# Altium PCB LIN_Controller_Board.PcbDoc
Units mm, origin at the board's own origin, x right, y up, seen from the top; angles counter-clockwise.
Board outline 35 x 30 mm, 2 copper layers (Top Layer, Bottom Layer); 31 components, 33 nets, 137 pads, 40 vias.
Unrouted connection lines stored in the file: 3.
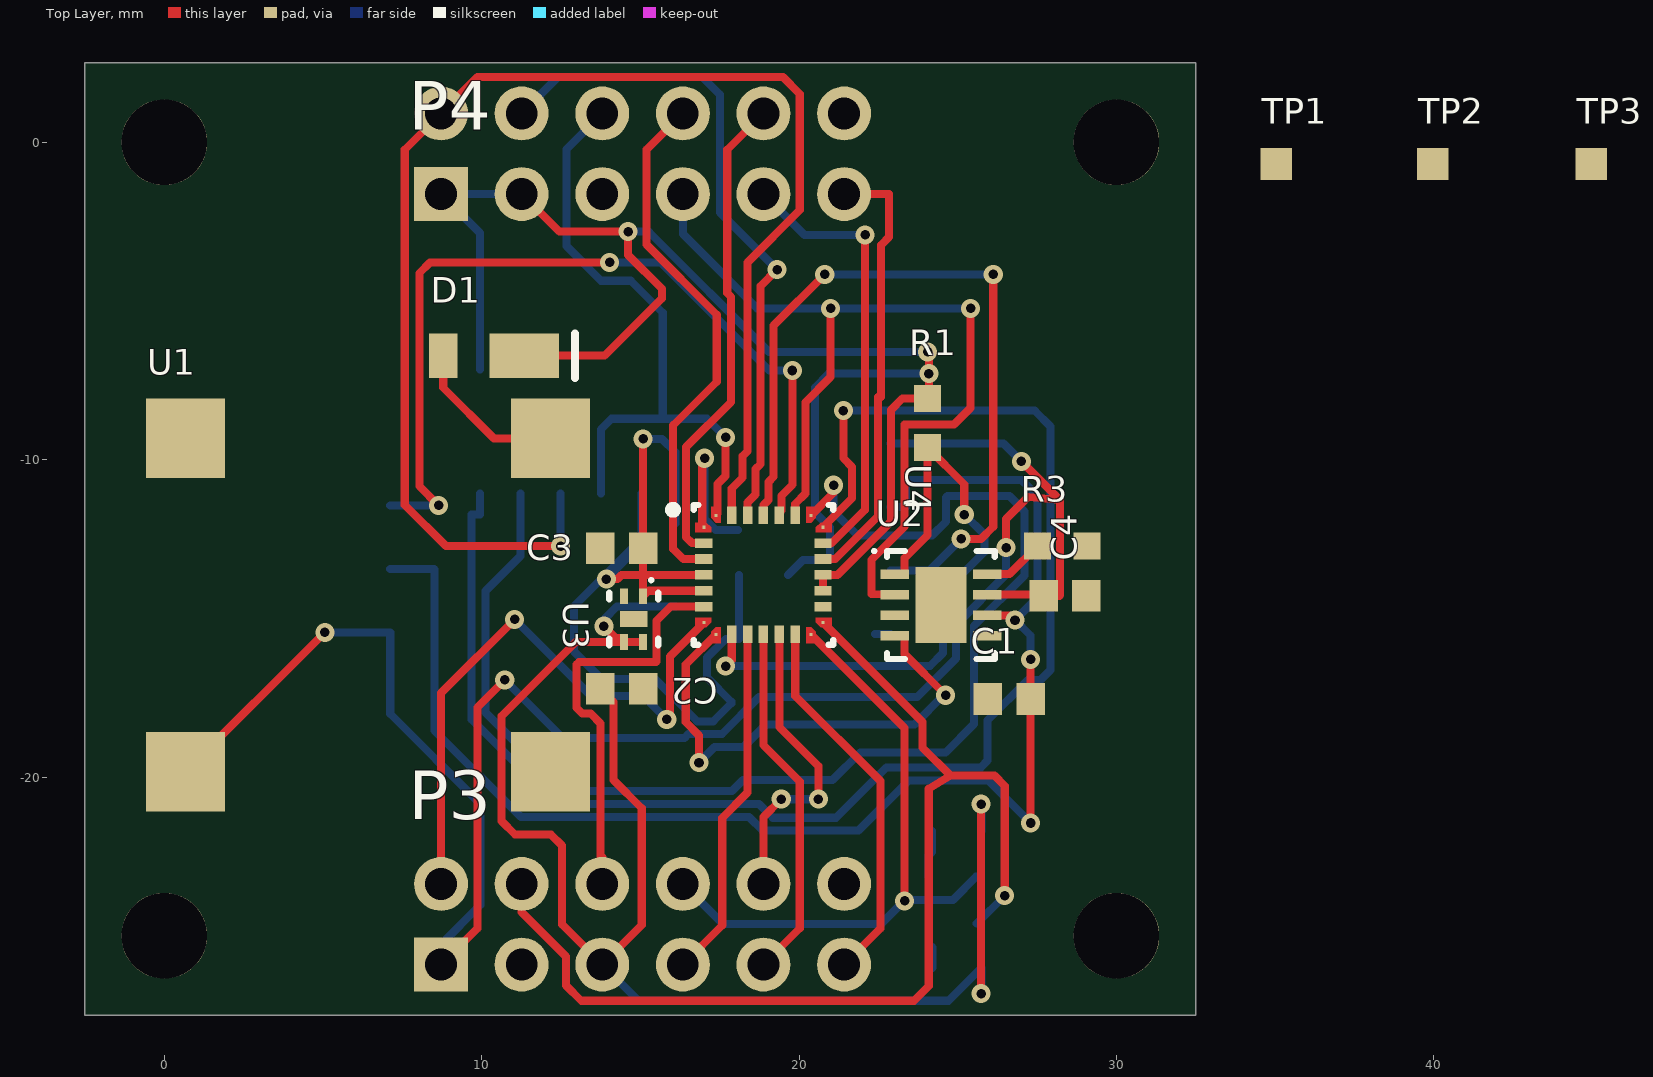
[diagram p0: Top Layer view]
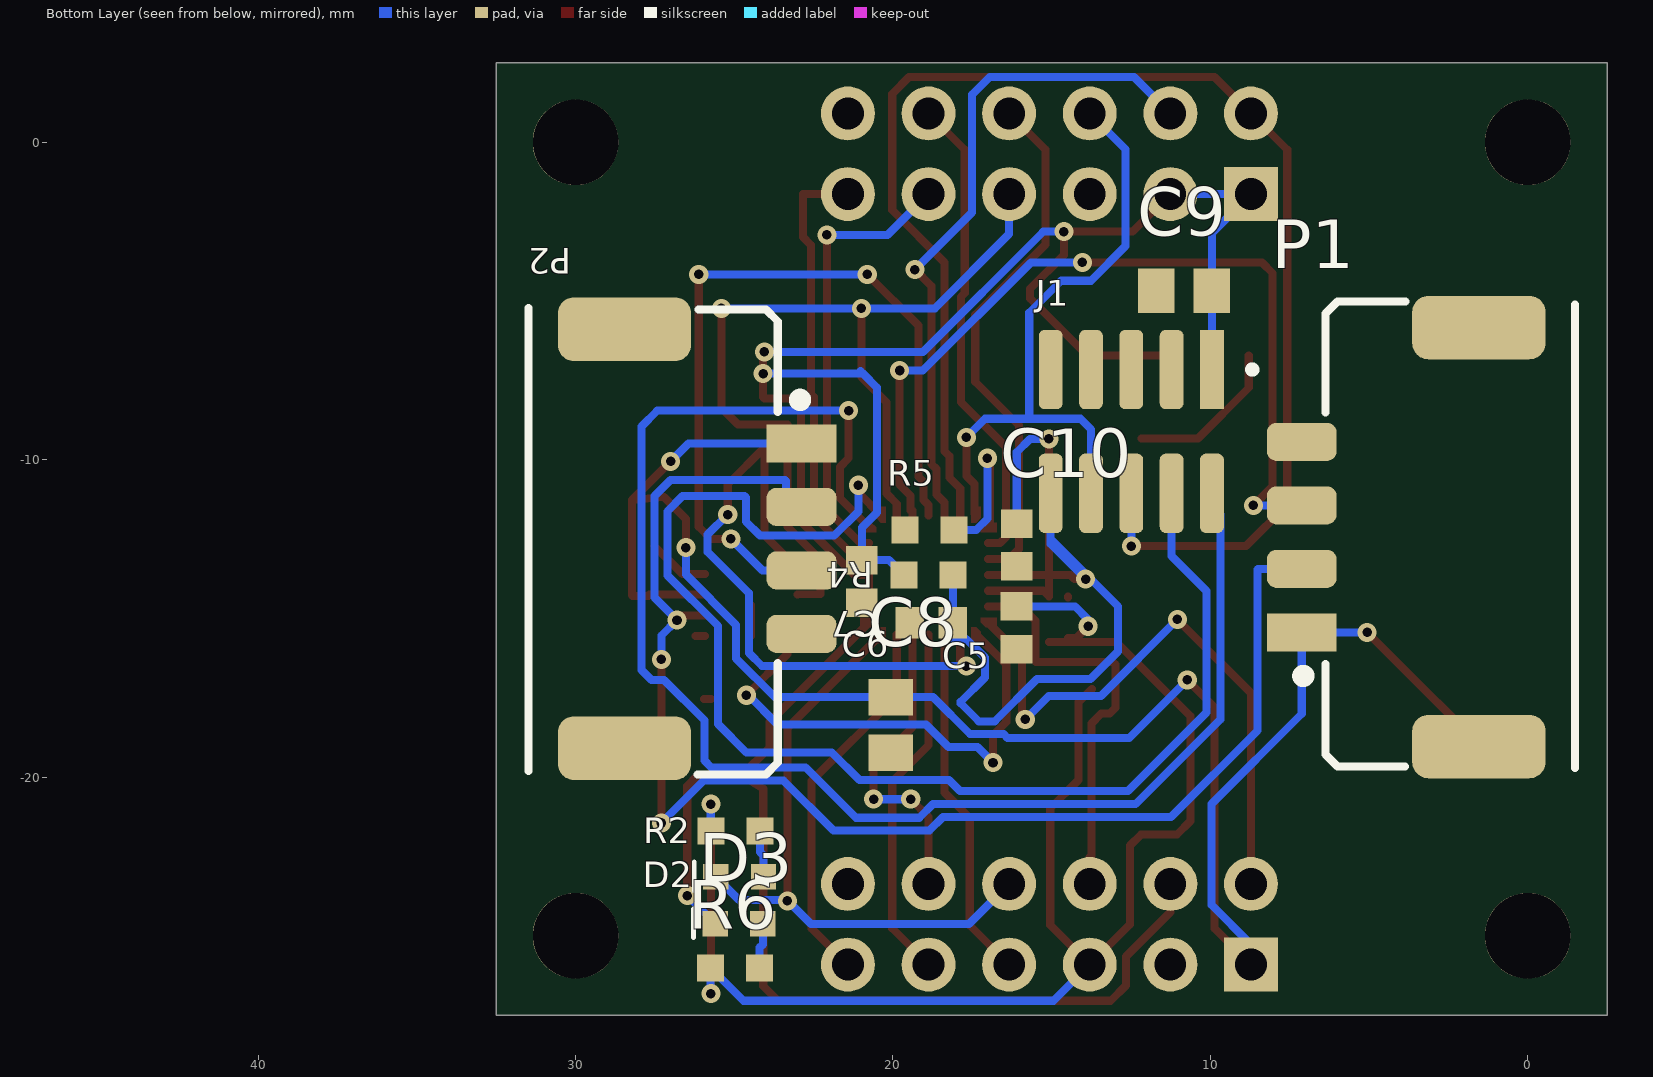
[diagram p1: Bottom Layer view, seen from below]
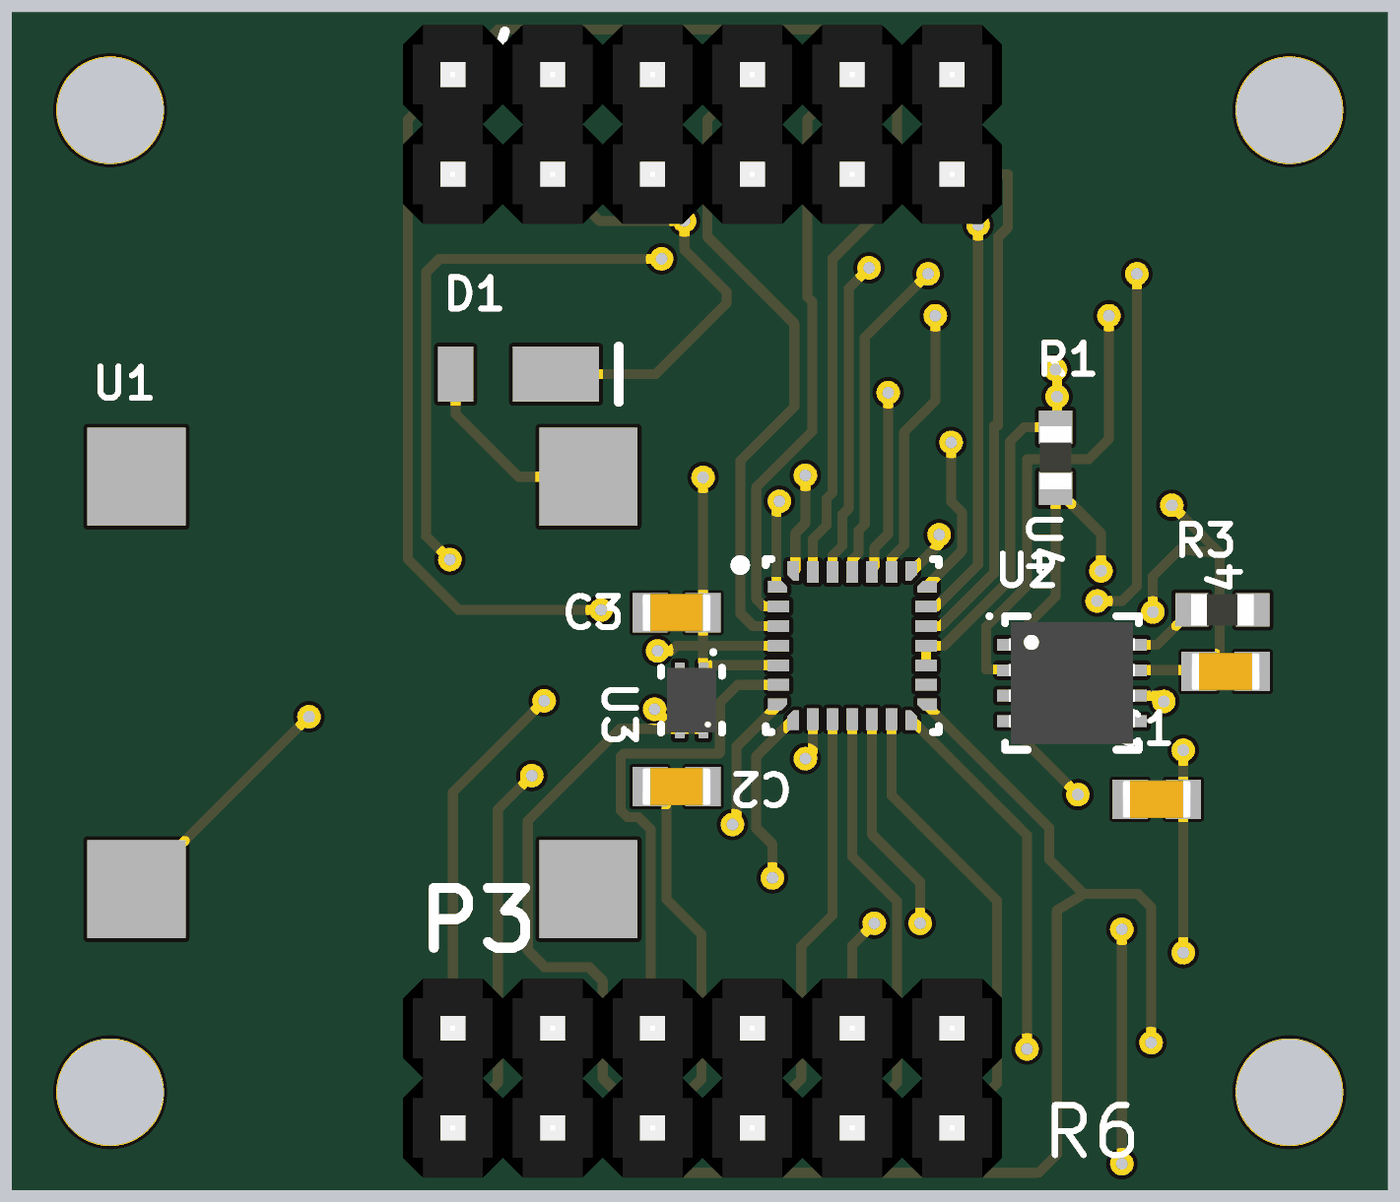
[diagram p2: 3D render of the assembled board from above, using the file's embedded part models]
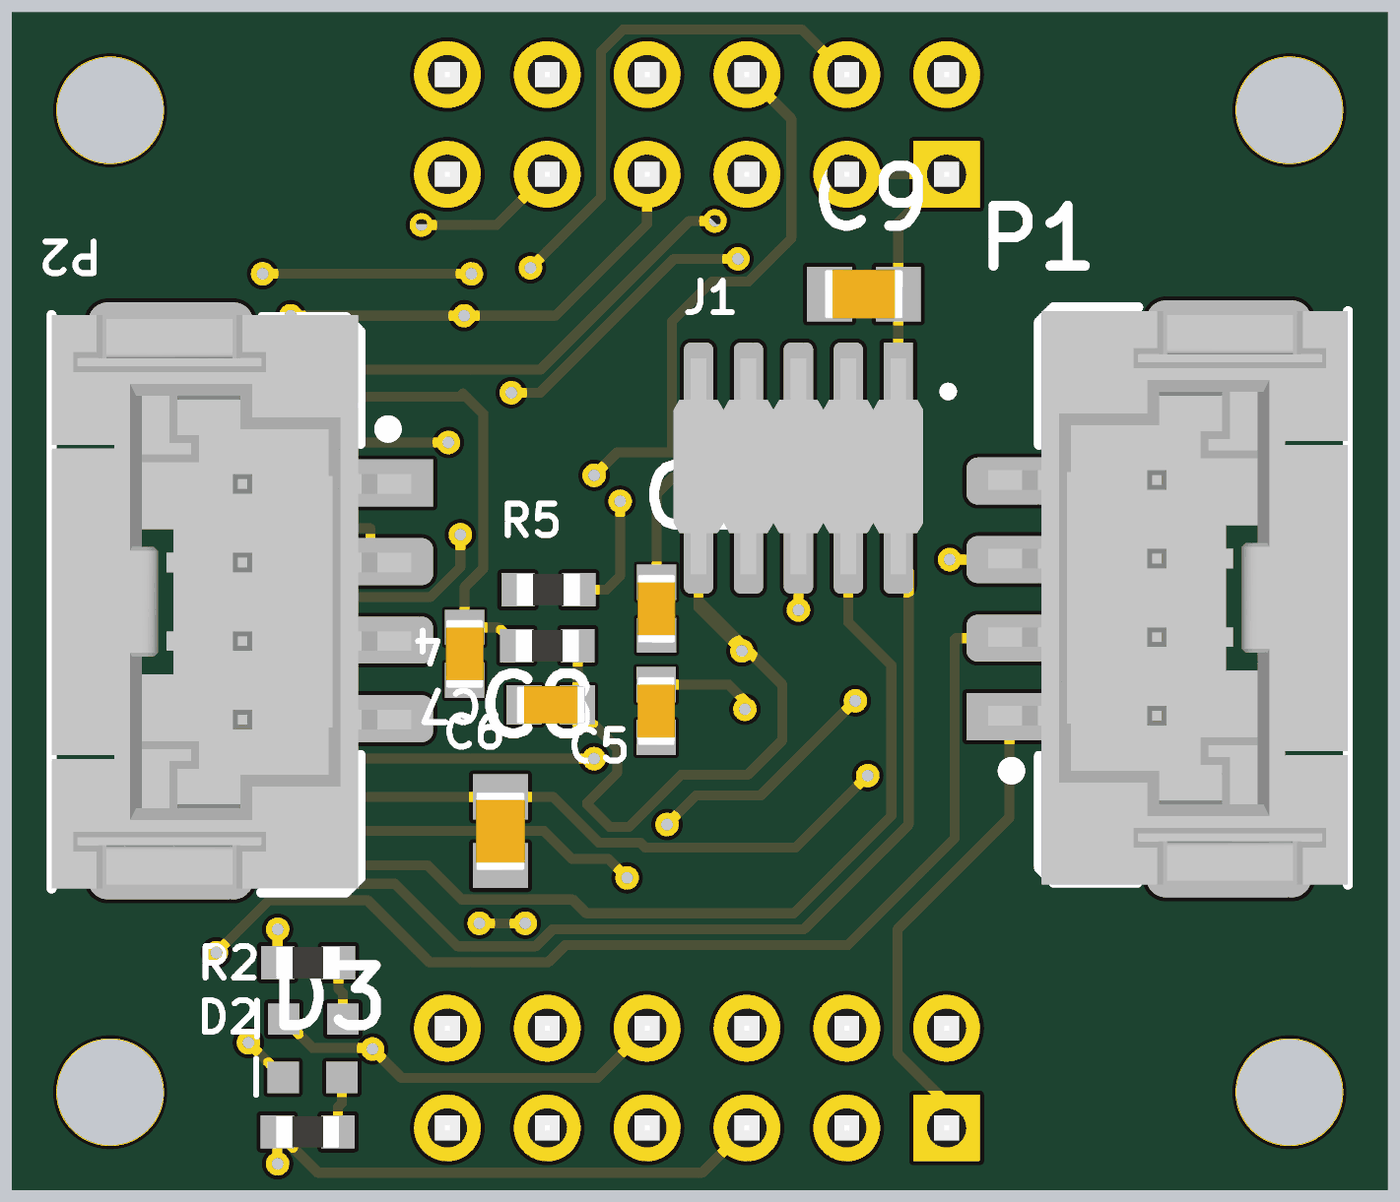
[diagram p3: 3D render of the assembled board from below, using the file's embedded part models]

## Layer stack, top to bottom
Top Solder: solder mask 0.0102, Solder Resist, Dk 3.5
Top Layer: signal copper 0.0356
Dielectric 1: dielectric 0.32, FR-4, Dk 4.8
Bottom Layer: signal copper 0.0356
Bottom Solder: solder mask 0.0102, Solder Resist, Dk 3.5

## Board outline
-2.5,-27.5 -2.5,2.5 32.5,2.5 32.5,-27.5

## Design rules (kind name [scope] priority, off if disabled: settings)
BoardOutlineClearance [All] p1: gap=0.406 ignorepadtopadclearanceinfootprint=FALSE
Clearance [All] p1: gap=0.152 ignorepadtopadclearanceinfootprint=FALSE except(0: Arc-Hole Track-Hole SMDPad-Hole THPad-Hole Via-Hole Fill-Hole Poly-Hole Region-Hole Text-Hole)
ComponentClearance ComponentClearance_ControllerBoard [InComponent('P1') vs Identifier = 'Controller-Board'] p1: gap=0 collisioncheckmode=3 verticalgap=0 showdistances=FALSE
ComponentClearance ComponentClearance_Standoffs [Identifier = 'Standoff' vs Identifier = 'Controller-Board'] p2: gap=0 collisioncheckmode=3 verticalgap=0 showdistances=FALSE
ComponentClearance [All] p3: gap=0.254 collisioncheckmode=3 verticalgap=0.254 showdistances=FALSE
DiffPairsRouting [All] p1: maxlimit=0.254 minlimit=0.254 mostfreqgap=0.254 toplayer_minwidth=0.152 toplayer_maxwidth=0.381 toplayer_prefwidth=0.254 bottomlayer_minwidth=0.152 bottomlayer_maxwidth=0.381 bottomlayer_prefwidth=0.254 maxuncoupledlength=12.7
HoleSize [All] p1: absolutevalues=TRUE maxlimit=6.3 minlimit=0.3 maxpercent=80.000 minpercent=20.000
MinimumAnnularRing [All] p1: minimumring=0.152
MinimumSolderMaskSliver [All] p1: minsoldermaskwidth=0.3
NetsToIgnore IgnoreGND [InNet('GND')] p1:
PolygonConnect [IsPad] p1: connectstyle=Relief reliefconductorwidth=0.254 reliefentries=4 polygonreliefangle="90 Angle" airgapwidth=0.254
PolygonConnect PolygonConnect_NoThermal [Not(IsPad)] p2: connectstyle=Direct reliefconductorwidth=0.254 reliefentries=4 polygonreliefangle="90 Angle" airgapwidth=0.254
RoutingVias [All] p1: holewidth=0.3 width=0.6 viastyle="Through Hole" minholewidth=0.3 minwidth=0.6 maxholewidth=0.711 maxwidth=1.27
SilkToSolderMaskClearance [IsPad] p1: minsilkscreentomaskgap=0.178 clearancetoexposedcopper=TRUE
SolderMaskExpansion [All] p1: expansion=0.102
Width [All] p1: maxlimit=2.54 minlimit=0.152 preferedwidth=0.254
25 further rules are at their usual default settings.

## Classes and differential pairs
component class LIN_Controller_Board: C1 C2 C3 C4 C5 C6 C7 C8 C9 C10 D1 D2 D3 J1 P1 P2 P3 P4 R1 R2 R3 R4 R5 R6 TP1 TP2 TP3 U2 U3
differential pair CAN_1: +CAN_1_P -CAN_1_N

## Components (designator, comment, footprint, x,y, rotation, side; value= is the part's Value field where it differs from the comment)
C1 "CAP CER 220PF 50V 5% X7R 0603" "CAP, 0603" 26.625,-17.54 r180 top value=220pF
C2 "CAP CER 1UF 50V 10% X7R 0603" "CAP, 0603" 14.41,-17.22 r0 top
C3 "CAP CER 1UF 50V 10% X7R 0603" "CAP, 0603" 14.41,-12.79 r180 top
C4 "CAP CER 1UF 50V 10% X7R 0603" "CAP, 0603" 28.38,-14.29 r0 top
C5 "CAP CER 0.1UF 50V 10% X7R 0603" "CAP, 0603" 16.11,-15.295 r90 bottom
C6 "CAP CER 0.1UF 50V 10% X7R 0603" "CAP, 0603" 20.98,-13.84 r90 bottom
C7 "CAP CER 0.1UF 50V 10% X7R 0603" "CAP, 0603" 18.79,-15.14 r180 bottom
C8 "CAP CER 10uF 25V 10% X5R 0805" "CAP, 0805" 20.07,-18.355 r270 bottom
C9 "CAP CER 10uF 25V 10% X5R 0805" "CAP, 0805" 10.825,-4.68 r0 bottom
C10 "CAP CER 0.1UF 50V 10% X7R 0603" "CAP, 0603" 16.1,-12.69 r90 bottom
D1 "DIODE SCHOTTKY 30V 1A POWERDI123" "DIODE SCHOTTKY 30V 1A POWERDI123" 8.79,-6.72 r0 top
D2 "LED BLUE CLEAR 2.8V 0603" LED_0603 24.131,-23.13 r0 bottom
D3 "LED BLUE CLEAR 2.8V 0603" LED_0603 24.151,-24.61 r0 bottom
J1 "CONN 10POS HEADR MALE 0.05\"" "CONN, 10POS 0.05\" Debug Header" 9.95,-7.16 r0 bottom
P1 "Dura-Clik" "CONN, 4POS DURA-CLIK VERT" 7.12,-15.44 r90 bottom
P2 "Dura-Clik" "CONN, 4POS DURA-CLIK VERT" 22.88,-9.49 r270 bottom
P3 "CONN 12POS HEADER MALE 0.1\"" "CONN, 12POS 0.100\" HEADER" 8.72,-25.91 r0 top locked
P4 "CONN 12POS HEADER MALE 0.1\"" "CONN, 12POS 0.100\" HEADER" 8.72,-1.63 r0 top
R1 "RES 2.4K OHM 1% 1/10W 0603" "RES, 0603" 24.05,-8.845 r270 top value=2.4K
R2 "2K" "RES, 0603" 24.966,-21.7 r180 bottom
R3 "RES 10K OHM 1% 1/10W 0603" "RES, 0603" 28.295,-12.72 r0 top
R4 "RES 100K OHM 5% 1/8W 0603" "RES, 0603" 18.88,-13.63 r0 bottom
R5 "RES 510 OHM 5% 1/10W 0603" "RES, 0603" 18.85,-12.21 r180 bottom
R6 "2K" "RES, 0603" 24.976,-26.01 r180 bottom
TP1 "Test Point" "Test Point" 35.04,-0.684 r90 top
TP2 "Test Point" "Test Point" 39.97,-0.684 r90 top
TP3 "Test Point" "Test Point" 44.96,-0.684 r90 top
U1 "IC DCDC 3.3V 0.5A 4-SMD" "IC DCDC 3.3V 0.5A 4-SMD" 0.67,-19.83 r90 top
U2 "IC LIN TRANSCEIVER TLE7257LE" "IC LIN TRANSCEIVER TLE7257LE" 24.47,-14.58 r0 top
U3 "IC REG LDO 3V 0.2A 4-TDFN" "IC REG LDO 3V 0.2A 4-TDFN" 15.09,-14.305 r180 top
U4 "IC MCU 32BIT 32KB FLASH 28UFQFPN" "IC MCU 32BIT 32KB FLASH 28UFQFPN" 18.88,-13.63 r0 top

## Footprints (in the part's own frame and the unit in brackets; to place one, negate y for a bottom-side part, rotate by r counter-clockwise, add the part's x,y. Pads: shape width x height; smd on the part's side, far side on the other; paste and mask are expansions set on the pad)
"CAP, 0603" [mm] "Chip Capacitor, 2-Leads, Body 1.60x0.81mm, IPC Medium Density"
  rect 0.9x1 smd mask+0.076: 1(-0.675,0) 2(0.675,0)
  body extent -0.87,-0.48 0.87,0.48, height 0.9
"CAP, 0805" [mm] "Chip Capacitor, 2-Leads, Body 2.00x1.25mm, IPC Medium Density"
  rect 1.15x1.4 smd: 1(-0.875,0) 2(0.875,0)
  body extent -1,-0.63 1,0.62, height 1.25
"CONN, 4POS DURA-CLIK VERT" [mm]
  rect 1.2x2.2 smd: 1(0,0)
  rrect50% 1.2x2.2 smd: 2(2,0) 3(4,0) 4(6,0)
  rrect50% 2x4.2 smd: 7(-3.6,-5.58) 7(9.6,-5.58)
  silkscreen extent -4.28,-8.61 10.42,0.05, body extent -4.28,-8.61 10.33,0.54, height 8
"CONN, 10POS 0.05\" Debug Header" [mm] "Amphenol 10 Positions Header Connector 0.050\" (1.27mm) Surface Mount Gold"
  rect 0.75x2.5 smd: 1(0,0)
  rrect50% 0.75x2.5 smd: 2(0,3.9) 3(1.27,0) 4(1.27,3.9) 5(2.54,0) 6(2.54,3.9) 7(3.81,0) 8(3.81,3.9) 9(5.08,0) 10(5.08,3.9)
  silkscreen extent -1.37,-0.1 -1.17,0.1, body extent -0.64,-0.84 5.71,4.65, height 4.5
"CONN, 12POS 0.100\" HEADER" [mm]
  rect 1.7x1.7 hole 1: 1(0,0)
  round 1.7 hole 1: 2(2.54,0) 3(5.08,0) 4(7.62,0) 5(10.16,0) 6(12.7,0) 7(12.7,2.54) 8(10.16,2.54) 9(7.62,2.54) 10(5.08,2.54) 11(2.54,2.54) 12(0,2.54)
  body extent -1.27,-1.27 13.97,3.81, height 5.08
"DIODE SCHOTTKY 30V 1A POWERDI123" [mm] "Diodes Incorporated DFLS130L-7"
  rect 0.9x1.4 smd: 1(0,0)
  rect 2.2x1.4 smd: 2(2.55,0)
  silkscreen extent 4.15,-0.7 4.15,0.7, body extent 0.1,-1 3.1,1, height 1
"IC DCDC 3.3V 0.5A 4-SMD" [mm] "ROF-78E3.3-0.5SMD-R"
  rect 2.5x2.5 smd: 1(0,0) 2(10.5,0) 3(10.5,-11.5) 4(0,-11.5)
  body extent -1,-12.5 11.5,1, height 4
"IC LIN TRANSCEIVER TLE7257LE" [mm] "SON, 8-Leads, Body 3.00x3.00mm, Pitch 0.65mm, Thermal Pad 2.40x1.58mm, IPC Medium Density"
  rect 0.9x0.3 smd: 1(-1.455,0.975) 2(-1.455,0.325) 3(-1.455,-0.325) 4(-1.455,-0.975) 5(1.455,-0.975) 6(1.455,-0.325) 7(1.455,0.325) 8(1.455,0.975)
  rect 1.6x2.4 smd: 9(0,0)
  silkscreen extent -2.15,-1.7 1.7,1.75, body extent -1.6,-1.55 1.6,1.55, height 1.1
"IC MCU 32BIT 32KB FLASH 28UFQFPN" [mm] "QFN, 28-Leads, Body 4.00x4.00mm, Pitch 0.50mm, IPC Medium Density"
  rect 0.1x0.1 smd: 1(-1.875,1.5) 7(-1.875,-1.5) 8(-1.5,-1.875) 14(1.5,-1.875) 15(1.875,-1.5) 21(1.875,1.5) 22(1.5,1.875) 28(-1.5,1.875)
  rect 0.55x0.3 smd: 2(-1.875,1) 3(-1.875,0.5) 4(-1.875,0) 5(-1.875,-0.5) 6(-1.875,-1) 16(1.875,-1) 17(1.875,-0.5) 18(1.875,0) 19(1.875,0.5) 20(1.875,1)
  rect 0.3x0.55 smd: 9(-1,-1.875) 10(-0.5,-1.875) 11(0,-1.875) 12(0.5,-1.875) 23(1,1.875) 24(0.5,1.875) 25(0,1.875) 26(-0.5,1.875) 27(-1,1.875)
  rect 0.3x0.55 smd paste+0: 13(1,-1.875)
  Top Layer region: -1.65,-1.35 -1.65,-1.5 -1.8,-1.65 -2.15,-1.65 -2.15,-1.35
  Top Layer region: -1.65,1.35 -1.65,1.5 -1.8,1.65 -2.15,1.65 -2.15,1.35
  Top Layer region: -1.35,1.65 -1.5,1.65 -1.65,1.8 -1.65,2.15 -1.35,2.15
  Top Layer region: 1.35,1.65 1.5,1.65 1.65,1.8 1.65,2.15 1.35,2.15
  Top Layer region: 1.65,1.35 1.65,1.5 1.8,1.65 2.15,1.65 2.15,1.35
  Top Layer region: -1.35,-1.65 -1.5,-1.65 -1.65,-1.8 -1.65,-2.15 -1.35,-2.15
  Top Layer region: 1.35,-1.65 1.5,-1.65 1.65,-1.8 1.65,-2.15 1.35,-2.15
  Top Layer region: 1.65,-1.35 1.65,-1.5 1.8,-1.65 2.15,-1.65 2.15,-1.35
  silkscreen extent -2.97,-2.2 2.2,2.2, body extent -2.05,-2.05 2.05,2.05, height 0.6
"IC REG LDO 3V 0.2A 4-TDFN" [mm] "QFN, 4-Leads, Body 1.20x1.60mm, Pitch 0.50mm/1.40mm, Thermal Pad 0.86x0.50mm, IPC Medium Density"
  rect 0.25x0.5 smd: 1(0,0) 2(0.6,0) 3(0.6,1.44) 4(0,1.44)
  rect 0.86x0.5 smd: 5(0.3,0.715)
  silkscreen extent -0.47,-0.56 1.08,1.54, body extent -0.33,-0.11 0.92,1.54, height 0.6
LED_0603 [mm]
  rect 0.8x0.8 smd: 1(-0.05,0.01) 2(1.45,0.01)
  silkscreen extent 2.13,-0.46 2.13,0.45, body extent -0.09,-0.39 1.51,0.41, height 0.8
"RES, 0603" [mm] "Chip Resistor, 2-Leads, Body 1.60x0.80mm, IPC Medium Density"
  rect 0.85x0.85 smd: 1(-0.775,0) 2(0.775,0)
  body extent -0.8,-0.4 0.8,0.4, height 0.55
"Test Point" [mm]
  rect 1x1 smd: TP(0,0)

## Part data
C1: "220pF ±5% 50V Ceramic Capacitor X7R 0603 (1608 Metric)", Manufacturer="Murata Electronics North America", Manufacturer Part Number=GRM188R71H221JA01D, Operating Temperature="-55°C ~ 125°C", Package / Case="0603 (1608 Metric)", Ratings=-, Supplier Part Number 1=490-12545-1-ND, Temperature Coefficient=X7R, Tolerance=±5%, Voltage - Rated=50V, Applications="General Purpose", Category=Capacitors, ComponentLink1Description=http://search.murata.co.jp/Ceramy/image/img/A01X/G101/ENG/GRM188R71H221JA01-01.pdf, ComponentLink1URL=http://search.murata.co.jp/Ceramy/image/img/A01X/G101/ENG/GRM188R71H221JA01-01.pdf, Features=-, Height - Seated (Max)=-, Lead Spacing=-, Lead Style=-, Mounting Type="Surface Mount, MLCC", Notification="Current market demand for these product types have resulted in fluctuating and extending lead times. Lead times may differ.", Packaging="Cut Tape (CT)", Part Status=Active, Pricing 1="1=0.14, 10=0.093, 100=0.0413, 500=0.0295, 1000=0.02317 (CAD)", RoHS="RoHS Compliant", Size / Dimension="0.063\" L x 0.032\" W (1.60mm x 0.80mm)", Stock 1=42692, Supplier 1=Digi-Key, Thickness (Max)="0.035\" (0.90mm)"
C2 C3 C4: "1µF ±10% 50V Ceramic Capacitor X7R 0603 (1608 Metric)", Capacitance=1µF, Manufacturer 1="Taiyo Yuden", Manufacturer Part Number 1=UMK107AB7105KA-T, Operating Temperature="-55°C ~ 125°C", Package / Case="0603 (1608 Metric)", Ratings=-, Supplier Part Number 1=587-3247-1-ND, Temperature Coefficient=X7R, Tolerance=±10%, Voltage=50V, ComponentLink1Description=http://www.yuden.co.jp/productdata/catalog/en/mlcc_all_e.pdf, ComponentLink1URL=http://www.yuden.co.jp/productdata/catalog/en/mlcc_all_e.pdf, Height - Seated (Max)=-, Lead Spacing=-, Lead Style=-, Mounting Type="Surface Mount, MLCC", Packaging="Cut Tape (CT)", Part Status=Active, Size / Dimension="0.063\" L x 0.031\" W (1.60mm x 0.80mm)", Supplier 1=Digi-Key, Thickness (Max)="0.037\" (0.95mm)"
C5 C6 C7 C10: "0.10µF ±10% 50V Ceramic Capacitor X7R 0603 (1608 Metric)", Capacitance=0.1µF, Manufacturer 1="AVX Corporation", Manufacturer Part Number 1=06035C104KAT2A, Operating Temperature="-55°C ~ 125°C", Package / Case="0603 (1608 Metric)", Ratings=-, Supplier Part Number 1=478-5052-1-ND, Temperature Coefficient=X7R, Tolerance=±10%, Voltage=50V, ComponentLink1Description=http://datasheets.avx.com/X7RDielectric.pdf, ComponentLink1URL=http://datasheets.avx.com/X7RDielectric.pdf, Height - Seated (Max)=-, Lead Spacing=-, Lead Style=-, Mounting Type="Surface Mount, MLCC", Packaging="Cut Tape (CT)", Part Status=Active, Size / Dimension="0.063\" L x 0.032\" W (1.60mm x 0.81mm)", Supplier 1=Digi-Key, Thickness (Max)="0.035\" (0.90mm)"
C8 C9: "10µF ±10% 25V Ceramic Capacitor X5R 0805 (2012 Metric)", Capacitance=10µF, Manufacturer="Murata Electronics North America", Manufacturer Part Number=GRM21BR61E106KA73L, Operating Temperature="-55°C ~ 85°C", Package / Case="0805 (2012 Metric)", Ratings=-, Supplier Part Number 1=490-5523-1-ND, Temperature Coefficient=X5R, Tolerance=±10%, Voltage - Rated=25V, Applications="General Purpose", Category=Capacitors, ComponentLink1Description=http://search.murata.co.jp/Ceramy/image/img/A01X/G101/ENG/GRM21BR61E106KA73-01.pdf, ComponentLink1URL=http://search.murata.co.jp/Ceramy/image/img/A01X/G101/ENG/GRM21BR61E106KA73-01.pdf, Features=-, Height - Seated (Max)=-, Lead Spacing=-, Lead Style=-, Mounting Type="Surface Mount, MLCC", Packaging="Cut Tape (CT)", Part Status=Active, Pricing 1="1=0.3, 10=0.214, 100=0.1008, 500=0.07068, 1000=0.05851 (CAD)", RoHS="RoHS Compliant", Size / Dimension="0.079\" L x 0.049\" W (2.00mm x 1.25mm)", Stock 1=1695157, Supplier 1=Digi-Key, Thickness (Max)="0.053\" (1.35mm)"
D1: "Diode Schottky 30V 1A Surface Mount PowerDI™ 123", Capacitance @ Vr, F="76pF @ 10V, 1MHz", Current - Average Rectified (Io)=1A, Current - Reverse Leakage @ Vr="1mA @ 30V", Manufacturer="Diodes Incorporated", Manufacturer Part Number=DFLS130L-7, Operating Temperature - Junction="-40°C ~ 125°C", Package / Case=POWERDI®123, Supplier Device Package="PowerDI™ 123", Supplier Part Number 1=DFLS130LDICT-ND, Voltage - DC Reverse (Vr) (Max)=30V, Voltage - Forward (Vf) (Max) @ If="310mV @ 1A", Category="Discrete Semiconductor Products", ComponentLink1Description=https://www.diodes.com/assets/Datasheets/ds30492.pdf, ComponentLink1URL=https://www.diodes.com/assets/Datasheets/ds30492.pdf, Diode Type=Schottky, Mounting Type="Surface Mount", Packaging="Cut Tape (CT)", Part Status=Active, Pricing 1="1=0.7, 10=0.599, 100=0.447, 500=0.35126, 1000=0.27142 (CAD)", RoHS="RoHS Compliant", Speed="Fast Recovery =< 500ns, > 200mA (Io)", Stock 1=68200, Supplier 1=Digi-Key
D2: "Blue 470nm LED Indication - Discrete 2.8V 0603 (1608 Metric)", Color=Blue, Current - Test=5mA, Lens Color=Colorless, Manufacturer 1="Lite-On Inc.", Manufacturer Part Number 1=LTST-C193TBKT-5A, Millicandela Rating=15mcd, Package / Case="0603 (1608 Metric)", Supplier Device Package="Chip LED", Supplier Part Number 1=160-1827-1-ND, Voltage - Forward (Vf) (Typ)=2.8V, ComponentLink1Description=http://optoelectronics.liteon.com/upload/download/DS22-2004-060/P_100_LTST-C193TBKT-5A.pdf, ComponentLink1URL=http://optoelectronics.liteon.com/upload/download/DS22-2004-060/P_100_LTST-C193TBKT-5A.pdf, Height (Max)=0.45mm, Lens Style/Size="Rectangle with Flat Top, 1.15mm x 0.80mm", Lens Transparency=Clear, Mounting Type="Surface Mount", Packaging="Cut Tape (CT)", Part Status=Active, Size / Dimension="1.60mm L x 0.80mm W", Supplier 1=Digi-Key, Viewing Angle=130°, Wavelength - Dominant=470nm, Wavelength - Peak=468nm
D3: "Blue 470nm LED Indication - Discrete 2.8V 0603 (1608 Metric)", Color=Red, Current - Test=5mA, Lens Color=Colorless, Manufacturer 1="Lite-On Inc.", Manufacturer Part Number 1=LTST-C193TBKT-5A, Millicandela Rating=15mcd, Package / Case="0603 (1608 Metric)", Supplier Device Package="Chip LED", Supplier Part Number 1=160-1827-1-ND, Voltage - Forward (Vf) (Typ)=2.8V, ComponentLink1Description=http://optoelectronics.liteon.com/upload/download/DS22-2004-060/P_100_LTST-C193TBKT-5A.pdf, ComponentLink1URL=http://optoelectronics.liteon.com/upload/download/DS22-2004-060/P_100_LTST-C193TBKT-5A.pdf, Height (Max)=0.45mm, Lens Style/Size="Rectangle with Flat Top, 1.15mm x 0.80mm", Lens Transparency=Clear, Mounting Type="Surface Mount", Packaging="Cut Tape (CT)", Part Status=Active, Size / Dimension="1.60mm L x 0.80mm W", Supplier 1=Digi-Key, Viewing Angle=130°, Wavelength - Dominant=470nm, Wavelength - Peak=468nm
J1: "10 Positions Header Connector 0.050\" (1.27mm) Surface Mount Gold", Current Rating=-, Insulation Color=Black, Manufacturer 1="Amphenol FCI", Manufacturer Part Number 1=20021121-00010C4LF, Material Flammability Rating="UL94 V-0", Supplier Part Number 1=609-3695-1-ND, ComponentLink1Description=http://portal.fciconnect.com/Comergent//fci/drawing/20021121.pdf, ComponentLink1URL=http://portal.fciconnect.com/Comergent//fci/drawing/20021121.pdf, Connector Type=Header, Contact Finish - Mating=Gold, Contact Finish - Post=Tin, Contact Finish Thickness - Mating="10µin (0.25µm)", Contact Finish Thickness - Post="50µin (1.27µm)", Contact Length - Mating="0.120\" (3.05mm)", Contact Length - Post=-, Contact Material="Copper Alloy", Contact Shape=Square, Contact Type="Male Pin", Fastening Type=-, Ingress Protection=-, Insulation Height=-, Insulation Material=Thermoplastic, Mated Stacking Heights=-, Mounting Type="Surface Mount", Number of Positions=10, Number of Positions Loaded=All, Number of Rows=2, Operating Temperature=-, Overall Contact Length=-, Packaging="Cut Tape (CT)", Part Status=Active, Pitch - Mating="0.050\" (1.27mm)", Row Spacing - Mating="0.050\" (1.27mm)", Shrouding=Unshrouded, Style="Board to Board", Supplier 1=Digi-Key, Termination=Solder, Voltage=-
P1 P2: library part "CONN 4POS DURA-CLIK 0.079\"", "4 Positions Header Connector 0.079\" (2.00mm) Surface Mount Tin", Current Rating=-, Insulation Color=Natural, Manufacturer="Molex, LLC", Manufacturer Part Number=5600200420, Supplier Part Number 1=WM10864CT-ND, Applications="Automotive, Industrial", Category="Connectors, Interconnects", ComponentLink1Description=http://www.molex.com/pdm_docs/sd/5600200420_sd.pdf, ComponentLink1URL=http://www.molex.com/pdm_docs/sd/5600200420_sd.pdf, Connector Type=Header, Contact Finish - Mating=Tin, Contact Finish - Post=Tin, Contact Finish Thickness - Mating=-, Contact Finish Thickness - Post=-, Contact Length - Mating=-, Contact Length - Post=-, Contact Material="Copper Alloy", Contact Shape=Square, Contact Type="Male Pin", Fastening Type="Latch Lock", Features="Solder Retention", Ingress Protection=-, Insulation Height="0.315\" (8.00mm)", Insulation Material="Polyamide (PA), Nylon", Mated Stacking Heights=9.3mm, Material Flammability Rating=-, Mounting Type="Surface Mount", Number of Positions=4, Number of Positions Loaded=All, Number of Rows=1, Operating Temperature=-, Overall Contact Length=-, Packaging="Cut Tape (CT)", Part Status=Active, Pitch - Mating="0.079\" (2.00mm)", Pricing 1="1=2.23, 10=2.022, 25=1.898, 50=1.8156, 100=1.733 (CAD)", RoHS="RoHS Compliant", Row Spacing - Mating=-, Shrouding="Shrouded - 4 Wall", Stock 1=9367, Style="Board to Cable/Wire", Supplier 1=Digi-Key, Termination=Solder, Voltage Rating=-
P3 P4: "6 Positions Header Connector 0.100\" (2.54mm) Through Hole Gold or Gold, GXT", Current Rating=-, Insulation Color=Black, Manufacturer="Amphenol FCI", Manufacturer Part Number=67997-206HLF, Material Flammability Rating="UL94 V-0", Supplier Part Number 1=609-3234-ND, Applications=-, Category="Connectors, Interconnects", ComponentLink1Description=http://cdn.amphenol-icc.com/media/wysiwyg/files/drawing/67996.pdf, ComponentLink1URL=http://cdn.amphenol-icc.com/media/wysiwyg/files/drawing/67996.pdf, Connector Type=Header, Contact Finish - Mating="Gold or Gold, GXT™", Contact Finish - Post=-, Contact Finish Thickness - Mating="15µin (0.38µm)", Contact Finish Thickness - Post=-, Contact Length - Mating="0.230\" (5.84mm)", Contact Length - Post="0.120\" (3.05mm)", Contact Material="Phosphor Bronze", Contact Shape=Square, Contact Type="Male Pin", Fastening Type=Push-Pull, Features=-, Ingress Protection=-, Insulation Height="0.100\" (2.54mm)", Insulation Material=-, Mated Stacking Heights=-, Mounting Type="Through Hole", Number of Positions=6, Number of Positions Loaded=All, Number of Rows=2, Operating Temperature=-, Overall Contact Length="0.450\" (11.43mm)", Packaging=Bulk, Part Status=Active, Pitch - Mating="0.100\" (2.54mm)", Pricing 1="1=0.43, 10=0.402, 100=0.2817, 500=0.24142, 1000=0.20118, 5000=0.17243, 10000=0.16094 (CAD)", RoHS="RoHS Compliant", Row Spacing - Mating="0.100\" (2.54mm)", Shrouding=Unshrouded, Stock 1=22830, Style="Board to Board", Supplier 1=Digi-Key, Termination=Solder, Voltage Rating=-
R1: "2.4 kOhms ±1% 0.1W, 1/10W Chip Resistor 0603 (1608 Metric) Moisture Resistant Thick Film", Manufacturer=Yageo, Manufacturer Part Number=RC0603FR-072K4L, Operating Temperature="-55°C ~ 155°C", Package / Case="0603 (1608 Metric)", Power (Watts)="0.1W, 1/10W", Supplier Device Package=0603, Supplier Part Number 1=311-2.40KHRCT-ND, Temperature Coefficient=±100ppm/°C, Tolerance=±1%, Category=Resistors, ComponentLink1Description=http://www.yageo.com/documents/recent/PYu-RC_Group_51_RoHS_L_8.pdf, ComponentLink1URL=http://www.yageo.com/documents/recent/PYu-RC_Group_51_RoHS_L_8.pdf, Composition="Thick Film", Failure Rate=-, Features="Moisture Resistant", Height - Seated (Max)="0.022\" (0.55mm)", Packaging="Cut Tape (CT)", Part Status=Active, Pricing 1="1=0.15, 10=0.022, 100=0.0089, 1000=0.00396, 2500=0.00344 (CAD)", RoHS="RoHS Compliant", Size / Dimension="0.063\" L x 0.032\" W (1.60mm x 0.80mm)", Stock 1=644006, Supplier 1=Digi-Key
R2 R6: library part "RES 2K OHM 1% 1/10W 0603", "2k Ohm ±1% 0.1W, 1/10W Chip Resistor 0603 (1608 Metric) Moisture Resistant Thick Film", Manufacturer=Yageo, Manufacturer Part Number=RC0603FR-072KL, Operating Temperature="-55°C ~ 155°C", Package / Case="0603 (1608 Metric)", Power (Watts)="0.1W, 1/10W", Resistance (Ohms)=2k, Supplier Device Package=0603, Temperature Coefficient=±100ppm/°C, Tolerance=±1%, Category=Resistors, ComponentLink1Description=http://www.yageo.com/documents/recent/PYu-RC_Group_51_RoHS_L_7.pdf, ComponentLink1URL=http://www.yageo.com/documents/recent/PYu-RC_Group_51_RoHS_L_7.pdf, Composition="Thick Film", Failure Rate=-, Features="Moisture Resistant", Height - Seated (Max)="0.022\" (0.55mm)", Packaging="Cut Tape (CT)", Part Status=Active, Pricing 1="1=0.15, 10=0.023, 100=0.0093, 1000=0.00415, 2500=0.0036 (CAD)", RoHS="RoHS Compliant", Size / Dimension="0.063\" L x 0.031\" W (1.60mm x 0.80mm)", Stock 1=1750701, Supplier 1=Digi-Key
R3: "RES SMD 10K OHM 1% 1/10W 0603", Manufacturer 1=Yageo, Manufacturer Part Number 1=RC0603FR-0710KL, Operating Temperature="-55°C ~ 155°C", Package / Case="0603 (1608 Metric)", Power=1/10W, Resistance=10k, Supplier Device Package=0603, Supplier Part Number 1=311-10.0KHRCT-ND, Temperature Coefficient=±100ppm/°C, Tolerance=±1%, ComponentLink1Description=http://www.yageo.com/documents/recent/PYu-RC_Group_51_RoHS_L_7.pdf, ComponentLink1URL=http://www.yageo.com/documents/recent/PYu-RC_Group_51_RoHS_L_7.pdf, Composition="Thick Film", Failure Rate=-, Height - Seated (Max)="0.022\" (0.55mm)", Packaging="Cut Tape (CT)", Part Status=Active, Size / Dimension="0.063\" L x 0.031\" W (1.60mm x 0.80mm)", Supplier 1=Digi-Key
R4: "RES SMD 100K OHM 5% 1/10W 0603", Manufacturer 1=Yageo, Manufacturer Part Number 1=RC0603JR-07100KL, Operating Temperature="-55°C ~ 155°C", Package / Case="0603 (1608 Metric)", Power=1/10W, Resistance=100k, Supplier Device Package=0603, Supplier Part Number 1=311-100KGRCT-ND, Temperature Coefficient=±100ppm/°C, Tolerance=±5%, ComponentLink1Description=http://www.yageo.com/documents/recent/PYu-RC_Group_51_RoHS_L_7.pdf, ComponentLink1URL=http://www.yageo.com/documents/recent/PYu-RC_Group_51_RoHS_L_7.pdf, Composition="Thick Film", Failure Rate=-, Height - Seated (Max)="0.022\" (0.55mm)", Packaging="Cut Tape (CT)", Part Status=Active, Size / Dimension="0.063\" L x 0.031\" W (1.60mm x 0.80mm)", Supplier 1=Digi-Key
R5: "RES SMD 510 OHM 5% 1/10W 0603", Manufacturer 1=Yageo, Manufacturer Part Number 1=RC0603JR-07510RL, Operating Temperature="-55°C ~ 155°C", Package / Case="0603 (1608 Metric)", Power=1/10W, Resistance=510, Supplier Device Package=0603, Supplier Part Number 1=311-510GRCT-ND, Temperature Coefficient=±100ppm/°C, Tolerance=±5%, ComponentLink1Description=http://www.yageo.com/documents/recent/PYu-RC_Group_51_RoHS_L_7.pdf, ComponentLink1URL=http://www.yageo.com/documents/recent/PYu-RC_Group_51_RoHS_L_7.pdf, Composition="Thick Film", Failure Rate=-, Height - Seated (Max)="0.022\" (0.55mm)", Packaging="Cut Tape (CT)", Part Status=Active, Size / Dimension="0.063\" L x 0.031\" W (1.60mm x 0.80mm)", Supplier 1=Digi-Key
U1: "Non-isolated PoL DC-DC Module 3.3V Output 0.5A 5-36V Input", Current - Output (Max)=500mA, Manufacturer="Recom Power", Manufacturer Part Number=ROF-78E3.3-0.5SMD-R, Operating Temperature="-40°C ~ 75°C", Package / Case="4-SMD Module", Supplier Part Number 1=945-1689-1-ND, Voltage - Input (Max)=36V, Voltage - Input (Min)=5V, Voltage - Isolation=-, Voltage - Output 1=3.3V, Applications="ITE (Commercial)", Category="Power Supplies - Board Mount", ComponentLink1Description=https://www.recom-power.com/pdf/Innoline/ROF-78Exx-0.5.pdf, ComponentLink1URL=https://www.recom-power.com/pdf/Innoline/ROF-78Exx-0.5.pdf, Efficiency=84%, Features=SCP, Mounting Type="Surface Mount", Number of Outputs=1, Packaging="Cut Tape (CT)", Part Status=Active, Pricing 1="1=4.97, 5=4.906, 10=4.836, 25=4.6944, 50=4.5516, 100=4.4094, 250=4.26728 (CAD)", RoHS="RoHS Compliant", Size / Dimension="0.53\" L x 0.49\" W x 0.18\" H (13.5mm x 12.5mm x 4.5mm)", Stock 1=2290, Supplier 1=Digi-Key, Type="Non-Isolated PoL Module", Voltage - Output 2=-, Voltage - Output 3=-
U2: "1/1 Transceiver LIN PG-TSON-8", Manufacturer="Infineon Technologies", Manufacturer Part Number=TLE7257LEXUMA1, Operating Temperature="-40°C ~ 150°C", Package / Case="8-TDFN Exposed Pad", Supplier Device Package=PG-TSON-8, Supplier Part Number 1=TLE7257LEXUMA1CT-ND, Voltage - Supply="5.5 V ~ 18 V", Category="Integrated Circuits (ICs)", ComponentLink1Description=https://www.infineon.com/dgdl/Infineon-TLE7257-DS-v01_10-EN.pdf?fileId=5546d46259d9a4bf015a3d00335b5e7d, ComponentLink1URL=https://www.infineon.com/dgdl/Infineon-TLE7257-DS-v01_10-EN.pdf?fileId=5546d46259d9a4bf015a3d00335b5e7d, Data Rate=20kbps, Duplex=-, Mounting Type="Surface Mount", Number of Drivers/Receivers=1/1, Packaging="Cut Tape (CT)", Part Status=Active, Pricing 1="1=1.3, 10=1.14, 100=0.8742, 500=0.69104, 1000=0.55284 (CAD)", Protocol=LIN, RoHS="RoHS Compliant", Stock 1=1710, Supplier 1=Digi-Key, Type=Transceiver
U3: Current - Limit (Min)=250mA, Current - Output=200mA, Manufacturer="Microchip Technology", Manufacturer Part Number=MIC94310-PYMT-TR, Operating Temperature="-40°C ~ 125°C", Package / Case="4-UFDFN Exposed Pad", Supplier Device Package="4-TDFN (1.2x1.6)", Supplier Part Number 1=576-4761-1-ND, Voltage - Dropout (Typical)="0.04V @ 200mA", Voltage - Input="Up to 3.6V", Voltage - Output=3V, Category="Integrated Circuits (ICs)", ComponentLink1Description=http://www.microchip.com/mymicrochip/filehandler.aspx?ddocname=en580409, ComponentLink1URL=http://www.microchip.com/mymicrochip/filehandler.aspx?ddocname=en580409, Mounting Type="Surface Mount", Packaging="Cut Tape (CT)", Part Status=Active, Pricing 1="1=0.45, 25=0.3708, 100=0.3386 (CAD)", Regulator Topology="Positive Fixed", RoHS="RoHS Compliant", Stock 1=4802, Supplier 1=Digi-Key
U4: "ARM® Cortex®-M0 STM32F0 Microcontroller IC 32-Bit 48MHz 32KB (32K x 8) FLASH 28-UFQFPN (4x4)", Manufacturer=STMicroelectronics, Manufacturer Part Number=STM32F042G6U6, Operating Temperature="-40°C ~ 85°C (TA)", Package / Case="28-UFQFN Exposed Pad", Supplier Device Package="28-UFQFPN (4x4)", Supplier Part Number 1=497-17345-ND, Voltage - Supply (Vcc/Vdd)="1.65 V ~ 3.6 V", Category="Integrated Circuits (ICs)", ComponentLink1Description=http://www.st.com/content/ccc/resource/technical/document/datasheet/52/ad/d0/80/e6/be/40/ad/DM00105814.pdf/files/DM00105814.pdf/jcr:content/translations/en.DM00105814.pdf, ComponentLink1URL=http://www.st.com/content/ccc/resource/technical/document/datasheet/52/ad/d0/80/e6/be/40/ad/DM00105814.pdf/files/DM00105814.pdf/jcr:content/translations/en.DM00105814.pdf, Connectivity="CAN, HDMI-CEC, I²C, IrDA, LIN, SPI, UART/USART, USB", Core Processor="ARM® Cortex®-M0", Core Size=32-Bit, Data Converters="A/D 13x12b", EEPROM Size=-, Oscillator Type=Internal, Packaging=Tray, Part Status=Active, Peripherals="DMA, I²S, POR, PWM, WDT", Pricing 1="1=3.62, 10=3.253, 100=2.6146, 500=2.14816, 1000=1.7799 (CAD)", Program Memory Size="32KB (32K x 8)", Program Memory Type=FLASH, RAM Size="6K x 8", RoHS="RoHS Compliant", Speed=48MHz, Stock 1=902, Supplier 1=Digi-Key

## Free pads (board coordinates)
  round 2.7 hole 2.7: ""(0,-25) ""(0,0) ""(30,-25) ""(30,0)

## Via types
v1: diameter 0.6, hole 0.3, Top Layer to Bottom Layer, 40 vias

## Nets (pads, with @x,y where several pads share a name; then routed paths per layer and width w, separated by ;. In a path a pad name is that pad's centre, name@x,y a point inside that pad or via, vN(x,y) a via of type N, cw(c..) or ccw(c..) an arc to the next point about the centre after c; other vN are vias at no path point)
3V3: C2.1 C5.2 C6.2 C9.1 D1.2 J1.1 P3.3 P4.1 P4.2 R1.1 R2.1 R4.2 R6.1 TP1.TP U3.3 U3.4 U4.17 U4.18 | length 100.8
  Top Layer w0.254: P4.2 12.448,-2.818 v1(14.613,-2.818) 14.613,-3.548 15.68,-4.614 15.68,-4.916 13.876,-6.72 D1.2 ; C2.1 14.156,-17.641 14.156,-20.092 15.045,-20.981 15.045,-24.665 P3.3 12.53,-24.64 12.53,-22.16 12.187,-21.817 11.057,-21.817 10.625,-21.385 10.625,-18.083 12.963,-15.745 U3.3 ; v1(13.851,-15.249) 14.222,-15.619 14.49,-15.619 U3.3 ; U3.4 U3.3 ; U4.17 U4.18 21.216,-13.63 22.894,-11.952 22.894,-8.431 23.255,-8.07 R1.1 24.09,-8.03 v1(24.09,-7.29) 24.09,-6.642 v1(24.05,-6.602) ; v1(25.738,-26.822) v1(25.738,-20.852)
  Bottom Layer w0.254: J1.1 9.95,-5.942 C9.1 9.95,-2.86 P4.1 P4.2 ; P3.3 14.939,-27.049 24.711,-27.049 R6.1 25.751,-26.81 v1(25.738,-26.822) ; v1(13.851,-15.249) 13.851,-15.035 14.266,-14.62 C5.2 ; v1(14.613,-2.818) 15.264,-2.818 19.049,-6.602 v1(24.05,-6.602) ; R4.2 20.12,-13.165 C6.2 20.98,-12.139 20.506,-11.665 20.506,-7.733 20.949,-7.29 ; 21.027,-7.212 20.949,-7.29 ; v1(24.09,-7.29) 20.949,-7.29 ; v1(25.738,-20.852) 25.741,-20.854 R2.1
12V: C4.1 C8.1 P1.1 P2.1 P3.1 U1.1 U2.7 | length 64.7
  Top Layer w0.254: U1.1 v1(5.06,-15.44) ; P3.1 9.863,-24.767 9.863,-17.804 v1(10.727,-16.94) ; U2.7 27.67,-14.255 C4.1 28.202,-14.29 28.228,-14.265 28.228,-11.276 ; v1(26.526,-12.774) 26.526,-11.87 27.219,-11.177 28.228,-11.276 ; v1(27.008,-10.057) 28.228,-11.276
  Bottom Layer w0.254: v1(5.06,-15.44) P1.1 7.12,-18.007 9.965,-20.852 9.965,-24.027 8.72,-25.272 P3.1 ; v1(10.727,-16.94) 12.556,-18.769 16.391,-18.769 16.509,-18.651 17.567,-18.651 18.737,-17.48 C8.1 23.725,-17.48 24.943,-16.262 24.943,-15.205 26.526,-13.623 v1(26.526,-12.774) ; P2.1 26.442,-9.49 v1(27.008,-10.057)
BOOT0_1: R5.2 U4.1 | length 5.2
  Top Layer w0.254: 16.951,-12.021 16.951,-10.031 v1(17.026,-9.955) ; U4.1@16.974,-12.099 U4.1
  Bottom Layer w0.254: v1(17.026,-9.955) 17.026,-11.86 17.376,-12.21 R5.2
CAN_1_N: P4.5 U4.20 | length 14.2
  Top Layer w0.254: U4.20 21.031,-12.63 22.081,-11.581 v1(22.081,-2.919)
  Bottom Layer w0.254: P4.5 20.169,-2.919 v1(22.081,-2.919)
CAN_1_P: P4.6 U4.19 | length 14
  Top Layer w0.254: U4.19 21.141,-13.13 22.487,-11.784 22.487,-8.025 ; P4.6 22.836,-1.63 22.836,-2.984 22.589,-3.231 22.589,-8.025
GND: C1.2 C2.2 C3.2 C4.2 C5.1 C6.1 C7.1 C8.2 C9.2 C10.1 J1.3 J1.5 P1.4 P2.4 P3.7 P4.7 R3.2 R5.1 TP3.TP U1.2 U2.5 U2.9 U3.2 U3.5 U4.16 | length 3
  Top Layer w0.254: U3.2@14.49,-14.349 U3.2 ; U2.9@24.47,-15.555 U2.9 ; C1.2@25.738,-17.54 C1.2 ; U2.5 U2.5@26.229,-15.555
  Bottom Layer w0.254: J1.3 J1.3@11.22,-6.17 ; P2.4@22.395,-15.49 P2.4
LIN_BUS_1: C1.1 P1.2 P2.2 U2.6 | length 45.2
  Top Layer w0.254: U2.6 26.658,-14.905 v1(26.805,-15.052) ; v1(27.3,-21.449) C1.1 v1(27.3,-16.292)
  Bottom Layer w0.254: P1.2 8.492,-13.44 8.517,-13.465 8.517,-18.54 11.234,-21.257 18.422,-21.257 18.855,-21.69 21.878,-21.69 23.452,-20.115 25.967,-20.115 v1(27.3,-21.449) ; P2.2 23.376,-11.49 23.376,-10.666 23.402,-10.641 27.008,-10.641 27.512,-11.144 27.512,-14.346 v1(26.805,-15.052) 27.3,-15.547 v1(27.3,-16.292)
NetD1_1: D1.1 U1.3 | length 5.1
  Top Layer w0.254: D1.1 8.79,-7.733 10.387,-9.33 U1.3
NetD2_1: D2.1 R2.2 | length 1.5
  Bottom Layer w0.254: D2.1 24.081,-22.477 24.191,-22.367 R2.2
NetD3_1: D3.1 R6.2 | length 1.4
  Bottom Layer w0.254: D3.1 24.101,-25.273 24.201,-25.373 R6.2
NetR3_1: R3.1 U2.8 | length 2
  Top Layer w0.254: U2.8 26.635,-13.605 R3.1
NRST_1: C7.2 J1.10 R4.1 U4.4 | length 21.9
  Top Layer w0.254: v1(13.927,-13.765) 14.275,-13.765 14.41,-13.63 U4.4
  Bottom Layer w0.254: v1(13.927,-13.765) 15.03,-12.662 15.03,-12.495 ; J1.10 15.03,-12.495 ; R4.1 18.105,-14.39 18.115,-14.4 C7.2 18.115,-15.645 17.696,-15.645 17.102,-16.238 17.102,-16.864 17.864,-17.626 17.864,-17.677 17.297,-18.244 16.794,-18.244 15.464,-16.915 13.775,-16.915 12.904,-16.044 12.904,-14.621 15.03,-12.495
PA0_1: P3.10 U4.6 | length 13
  Top Layer w0.254: P3.10 13.8,-22.528 13.75,-22.528 13.75,-18.312 13.437,-17.999 13.169,-17.999 12.988,-17.818 12.988,-16.457 13.064,-16.381 15.487,-16.381 15.513,-16.356 15.513,-15.075 15.958,-14.63 U4.6
PA1_1: P3.12 U4.7 | length 18.9
  Top Layer w0.254: P3.12 8.72,-17.356 v1(11.041,-15.035) ; v1(15.832,-18.185) 15.934,-18.083 15.934,-16.201 U4.7
  Bottom Layer w0.254: v1(11.041,-15.035) 13.45,-17.444 15.092,-17.444 v1(15.832,-18.185)
PA2/USART2_TX_1: U2.4 U4.8 | length 16
  Top Layer w0.254: v1(16.848,-19.544) 16.848,-18.687 16.431,-18.269 16.431,-16.454 U4.8 ; U2.4 23.325,-15.555 23.325,-16.127 v1(24.621,-17.423)
  Bottom Layer w0.254: v1(16.848,-19.544) 17.335,-19.057 18.249,-19.057 18.962,-18.344 23.636,-18.344 24.557,-17.423 v1(24.621,-17.423)
PA3/USART2_RX_1: R1.2 U2.1 U4.9 | length 20.5
  Top Layer w0.254: v1(17.687,-16.508) 17.88,-16.315 U4.9 ; U2.1 23.325,-13.605 23.325,-13.105 24.05,-12.38 R1.2 25.206,-10.776 v1(25.206,-11.728)
  Bottom Layer w0.254: v1(17.687,-16.508) 24.12,-16.508 24.537,-16.092 24.537,-14.208 25.841,-12.904 25.841,-12.363 v1(25.206,-11.728)
PA4/SPI1_NSS_1: P3.4 U4.10 | length 11.2
  Top Layer w0.254: P3.4 17.58,-24.67 17.58,-21.292 18.38,-20.493 U4.10
PA5/SPI1_SCK_1: P3.5 U4.11 | length 11.4
  Top Layer w0.254: P3.5 20.023,-24.767 20.023,-20.141 18.88,-18.997 U4.11
PA6/SPI1_MISO_1: P3.8 U4.12 | length 9.8
  Top Layer w0.254: P3.8 18.88,-21.258 v1(19.439,-20.699) ; U4.12 19.38,-18.43 20.608,-19.658 v1(20.608,-20.699)
  Bottom Layer w0.254: v1(19.439,-20.699) v1(20.608,-20.699)
PA7/SPI1_MOSI_1: P3.6 U4.13 | length 12
  Top Layer w0.254: U4.13 19.88,-17.445 22.563,-20.128 22.563,-24.767 P3.6
PA13/SWDIO_1: J1.2 U4.21 | length 48.2
  Top Layer w0.254: U4.21 21.67,-11.215 21.67,-10.227 21.395,-9.953 v1(21.395,-8.456)
  Bottom Layer w0.254: J1.2 9.95,-11.733 9.686,-11.733 9.686,-18.185 12.352,-20.851 18.74,-20.851 19.172,-21.283 21.166,-21.283 22.757,-19.693 25.729,-19.693 25.942,-19.48 25.942,-18.21 27.212,-16.94 27.605,-16.94 27.923,-16.623 27.923,-8.952 27.427,-8.456 v1(21.395,-8.456)
PA14/SWCLK_1: J1.4 U4.22 | length 41.6
  Top Layer w0.254: U4.22 21.09,-11.045 v1(21.09,-10.807)
  Bottom Layer w0.254: J1.4 11.22,-13.04 10.124,-14.137 10.124,-17.97 12.598,-20.444 17.883,-20.444 18.233,-20.095 21.06,-20.095 21.928,-19.226 24.621,-19.226 25.518,-18.329 25.518,-15.235 27.105,-13.648 27.105,-11.627 26.628,-11.149 24.672,-11.149 24.626,-11.194 24.626,-11.954 24.187,-12.393 21.852,-12.393 21.09,-11.631 v1(21.09,-10.807)
PA15/LIN_EN_1: P4.4 U2.2 U4.23 | length 30.2
  Top Layer w0.254: U4.23 19.88,-11.39 20.2,-11.07 20.2,-8.19 20.992,-7.398 v1(20.992,-5.231) ; U2.2 22.284,-14.23 22.284,-13.155 23.325,-12.114 23.325,-8.888 24.887,-8.888 25.408,-8.368 v1(25.408,-5.231)
  Bottom Layer w0.254: P4.4 16.34,-2.893 18.677,-5.231 v1(20.992,-5.231) v1(25.408,-5.231)
PB0_1: D2.2 P3.9 U4.14 | length 21.1
  Top Layer w0.254: U4.14 23.325,-18.45 v1(23.325,-23.9)
  Bottom Layer w0.254: P3.9 17.606,-24.636 22.576,-24.636 ; v1(23.325,-23.9) 22.589,-24.636 22.576,-24.636 ; D2.2 24.846,-23.874 23.338,-23.874 22.576,-24.636
PB1_1: D3.2 P3.11 U4.15 | length 35.6
  Top Layer w0.254: P3.11 11.26,-24.255 12.657,-25.652 12.657,-26.567 13.14,-27.049 23.617,-27.049 24.087,-26.579 24.087,-20.369 24.773,-19.955 ; U4.15 23.893,-18.268 23.893,-19.075 24.773,-19.955 ; v1(26.481,-23.739) 26.481,-20.279 26.157,-19.955 24.773,-19.955
  Bottom Layer w0.254: D3.2 v1(26.481,-23.739)
PB3/LIN_ADDR_IN_1: P1.3 U4.24 | length 27.2
  Top Layer w0.254: v1(8.644,-11.44) 8.035,-10.83 8.035,-4.126 8.377,-3.783 v1(14.029,-3.783) ; U4.24 19.38,-11.607 19.444,-11.607 19.444,-11.138 19.794,-10.788 v1(19.794,-7.191)
  Bottom Layer w0.254: P1.3 v1(8.644,-11.44) ; v1(14.029,-3.783) 15.655,-3.783 19.062,-7.191 v1(19.794,-7.191)
PB4/LIN_ADDR_OUT_1: P2.3 U4.25 | length 25.5
  Top Layer w0.254: U4.25 18.88,-11.434 19.038,-11.276 19.038,-10.7 19.198,-10.539 19.198,-5.776 v1(20.811,-4.164) ; v1(25.108,-12.495) 25.738,-12.495 26.119,-12.114 v1(26.119,-4.164)
  Bottom Layer w0.254: v1(20.811,-4.164) v1(26.119,-4.164) ; P2.3 24.113,-13.49 v1(25.108,-12.495)
PB5_1: P4.11 U4.26 | length 21.3
  Top Layer w0.254: U4.26 18.38,-11.344 18.632,-11.093 18.632,-10.293 18.792,-10.133 18.792,-4.527 v1(19.307,-4.011)
  Bottom Layer w0.254: P4.11 12.409,2.059 16.95,2.059 17.509,1.5 17.509,-2.213 v1(19.307,-4.011)
PB6/USART1_TX_1: J1.6 P4.12 U4.27 | length 46.1
  Top Layer w0.254: v1(12.49,-12.724) 8.873,-12.724 7.577,-11.428 7.577,-0.233 P4.12 9.869,2.059 19.49,2.059 20.023,1.526 20.023,-2.137 18.377,-3.783 18.377,-9.735 18.225,-9.887 18.225,-10.559 17.88,-10.905 U4.27
  Bottom Layer w0.254: v1(12.49,-12.724) J1.6
PB7/USART1_RX_1: J1.8 P4.10 U4.28 | length 20.8
  Top Layer w0.254: U4.28 17.433,-11.702 17.433,-10.768 17.687,-10.514 v1(17.687,-9.295)
  Bottom Layer w0.254: J1.8 13.76,-9.043 14.092,-8.71 15.68,-8.71 ; P4.10 12.671,-0.219 12.671,-3.269 13.764,-4.362 14.698,-4.362 15.705,-5.37 15.705,-8.685 15.68,-8.71 ; v1(17.687,-9.295) 17.102,-8.71 15.68,-8.71
PF0-OSC/I2C1_SDA_1: P4.8 U4.2 | length 15.1
  Top Layer w0.254: U4.2 16.627,-12.63 16.442,-12.445 16.442,-9.6 17.862,-8.179 17.862,-4.873 17.737,-4.748 17.737,-0.233 P4.8
PF1-OSC/I2C1_SCL_1: P4.9 U4.3 | length 16.8
  Top Layer w0.254: P4.9 15.197,-0.233 15.197,-3.224 17.407,-5.434 17.407,-7.545 16.036,-8.916 16.036,-12.813 16.353,-13.13 U4.3
VDDA: C3.1 C10.2 TP2.TP U3.1 U4.5 | length 10.4
  Top Layer w0.254: v1(15.085,-9.345) C3.1 15.085,-14.044 15.09,-14.049 U3.1 15.265,-14.13 U4.5
  Bottom Layer w0.254: v1(15.085,-9.345) 15.68,-9.345 16.1,-9.765 C10.2
pads on no net: J1.7 J1.9 P1.7 P2.7 P3.2 P4.3 U1.4 U2.3